# Altium PCB PCB2.PcbDoc
Units mm, origin at the board's own origin, x right, y up, seen from the top; angles counter-clockwise.
Board outline 100 x 50 mm, 2 copper layers (Top Layer, Bottom Layer); 10 components, 8 nets, 30 pads, 12 vias.
Unrouted connection lines stored in the file: 1.
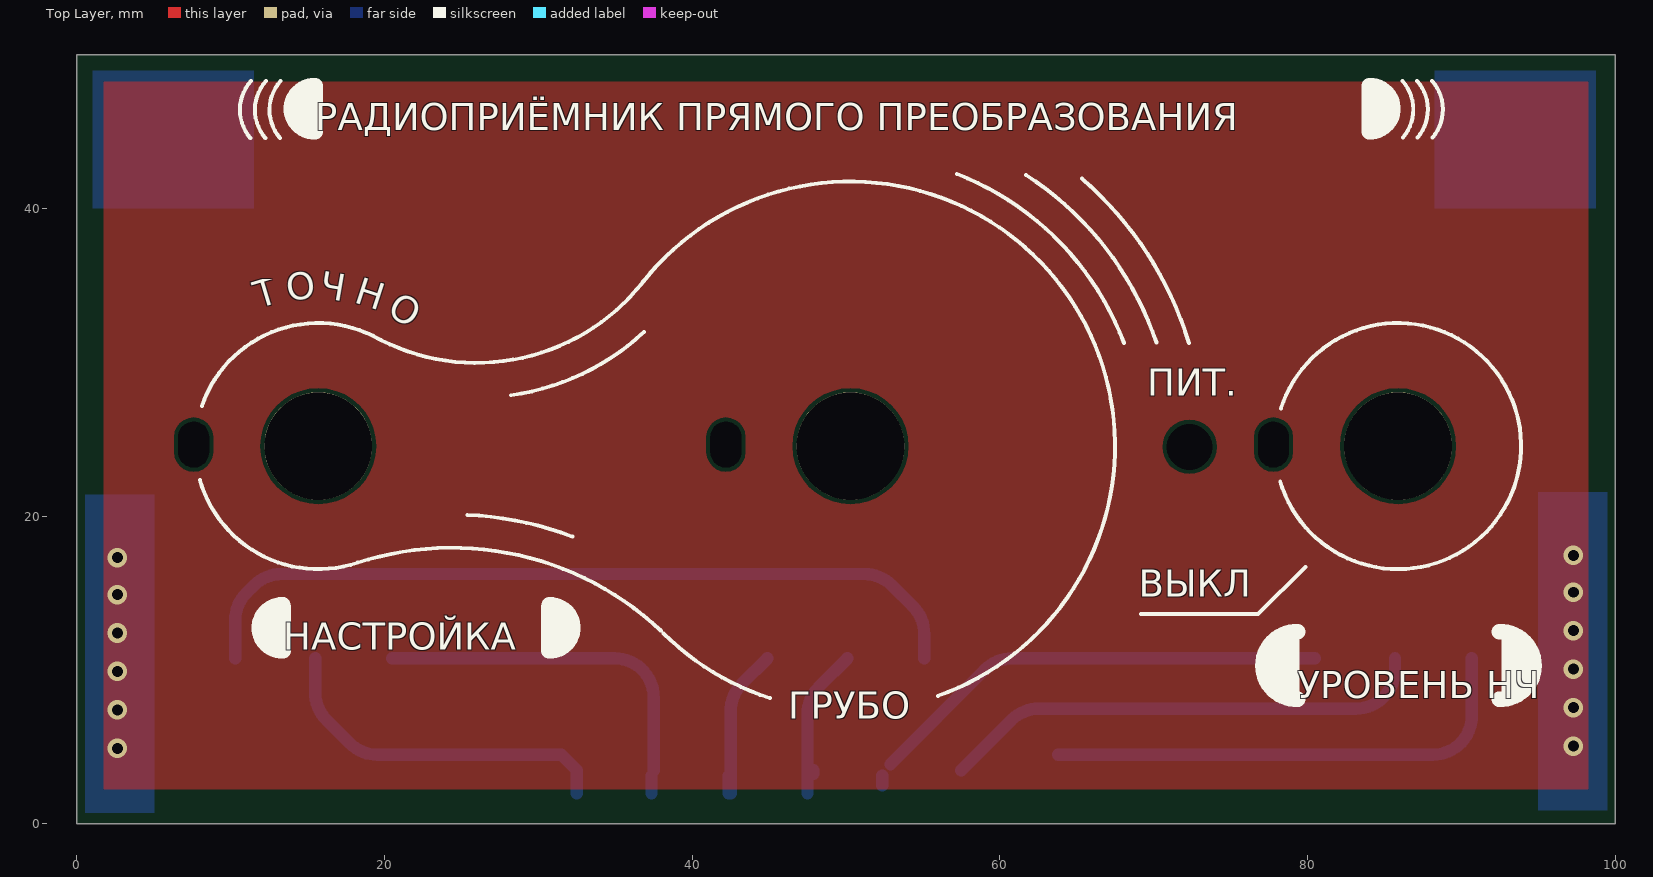
[diagram p0: Top Layer view]
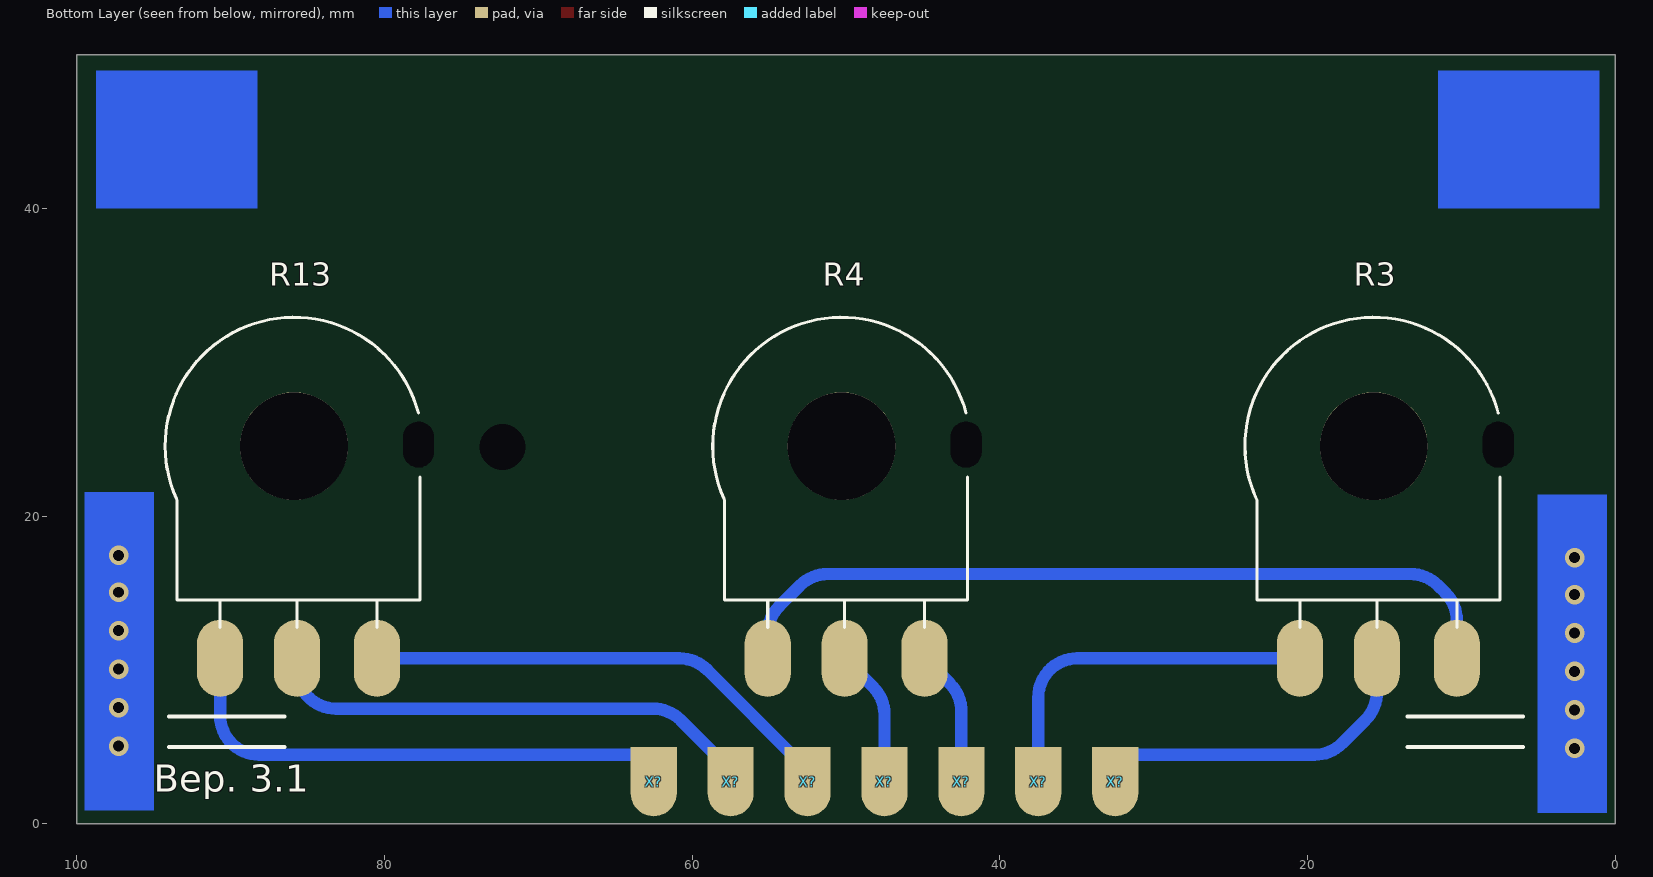
[diagram p1: Bottom Layer view, seen from below]
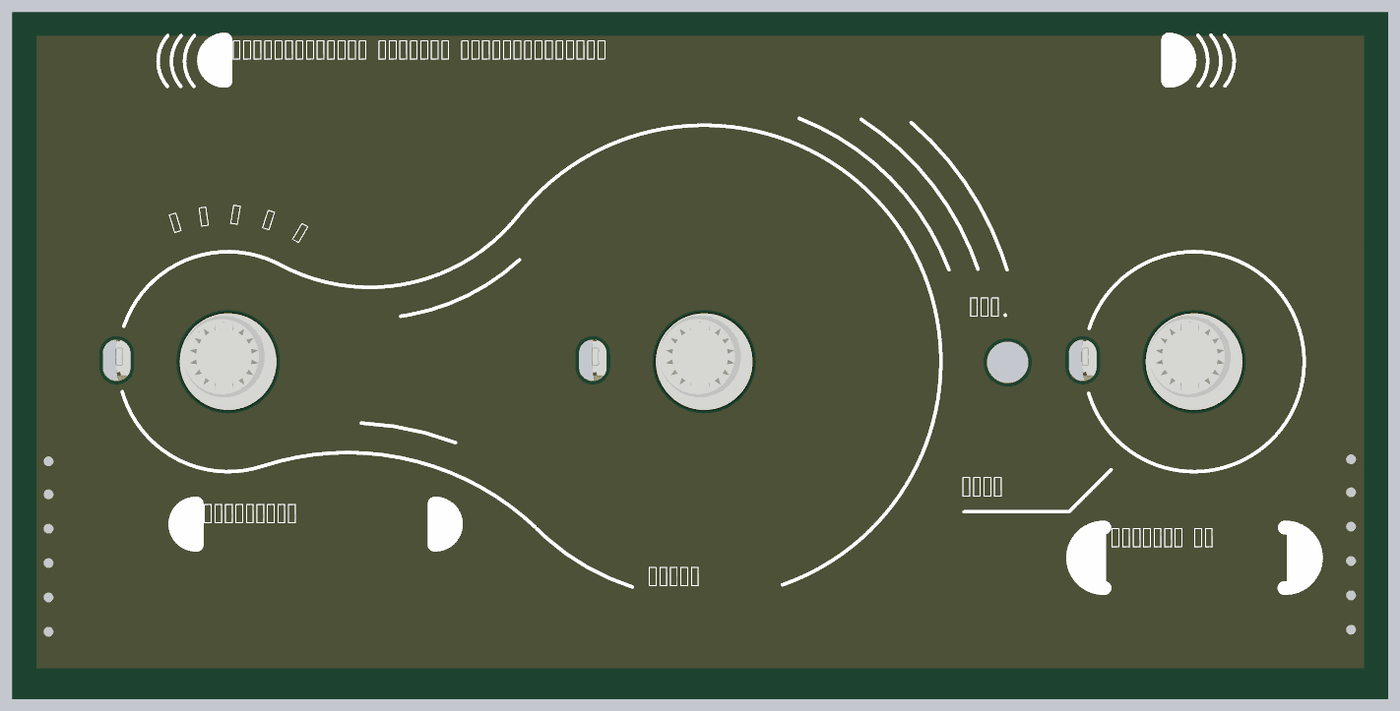
[diagram p2: 3D render of the assembled board from above, using the file's embedded part models]

## Layer stack, top to bottom
Top Solder: solder mask 0.0102, Solder Resist, Dk 3.5
Top Layer: signal copper 0.0356
Dielectric 1: dielectric 0.32, FR-4, Dk 4.8
Bottom Layer: signal copper 0.0356
Bottom Solder: solder mask 0.0102, Solder Resist, Dk 3.5

## Board outline
0,0 100,0 100,50 0,50

## Design rules (kind name [scope] priority, off if disabled: settings)
Clearance [All] p1: gap=0.254 ignorepadtopadclearanceinfootprint=FALSE except(0: Arc-Hole Track-Hole SMDPad-Hole THPad-Hole Via-Hole Fill-Hole Poly-Hole Region-Hole Text-Hole)
PolygonConnect [All] p1: connectstyle=Relief reliefconductorwidth=0.254 reliefentries=4 polygonreliefangle="90 Angle" airgapwidth=0.254
RoomDefinition Sheet2 [InComponentClass('Sheet2')] p1: confinementstyle=ConfineIn formatcopy=TRUE lockcomponents=FALSE outline -27,-75 23.8,-75 23.8,-49.6 -27,-49.6
RoutingVias [All] p1: holewidth=0.711 width=1.27 viastyle="Through Hole" minholewidth=0.711 minwidth=1.27 maxholewidth=0.711 maxwidth=1.27
SolderMaskExpansion [All] p1: expansion=0.102 istentingtop=FALSE
Width [All] p1: maxlimit=2 minlimit=0.254 preferedwidth=0.254
30 further rules are at their usual default settings.

## Classes and differential pairs
component class Sheet2: R3 R4 R13 X?

## Components (designator, comment, footprint, x,y, rotation, side; value= is the part's Value field where it differs from the comment)
R3 "WH148" WH148R 15.689,24.568 r0 top
R4 "WH148" WH148R 50.289,24.568 r0 top
R13 "WH148" WH148R 85.889,24.568 r0 top
X? "SMT_Contact" SMT_CONTACT_TYPE_1 32.5,2 r0 bottom
X? "SMT_Contact" SMT_CONTACT_TYPE_1 57.5,2 r0 bottom
X? "SMT_Contact" SMT_CONTACT_TYPE_1 42.5,2 r0 bottom
X? "SMT_Contact" SMT_CONTACT_TYPE_1 62.5,2 r0 bottom
X? "SMT_Contact" SMT_CONTACT_TYPE_1 52.5,2 r0 bottom
X? "SMT_Contact" SMT_CONTACT_TYPE_1 37.5,2 r0 bottom
X? "SMT_Contact" SMT_CONTACT_TYPE_1 47.5,2 r0 bottom

## Footprints (in the part's own frame and the unit in brackets; to place one, negate y for a bottom-side part, rotate by r counter-clockwise, add the part's x,y. Pads: shape width x height; smd on the part's side, far side on the other; paste and mask are expansions set on the pad)
SMT_CONTACT_TYPE_1 [mm]
  rect 3x3 smd: 1(0,-1.5)
  round 3 smd: 1(0,0)
WH148R [mm]
  oval 3x5 smd far side: 1(4.8,-13.8) 2(-0.2,-13.8) 3(-5.4,-13.8)
  round 0 hole 3 slot 2 at 0 deg: HOLE(-8.1,0.1)
  round 7 hole 7: HOLE(0,0)
  body extent -8.17,-16.4 7.57,8.24, height 17.73

## Free pads (board coordinates)
  round 1.5 hole 3: 0(72.339,24.518)

## Via types
v1: diameter 1.27, hole 0.711, Top Layer to Bottom Layer, tented top, 12 vias

## Nets (pads, with @x,y where several pads share a name; then routed paths per layer and width w, separated by ;. In a path a pad name is that pad's centre, name@x,y a point inside that pad or via, vN(x,y) a via of type N, cw(c..) or ccw(c..) an arc to the next point about the centre after c; other vN are vias at no path point)
GND: R13.3 X?.1@52.5,2 X?.1@52.5,3.5 | length 31
  Bottom Layer w0.8: X?.1@52.361,2.511 X?.1@52.361,3.132 ; X?.1@52.889,3.889 59.024,10.024 cw(c60.82,8.228) 60.82,10.768 73.5,10.768 R13.3
  other v1: 2.639,4.918 97.289,5.068 2.639,7.418 97.289,7.568 2.639,9.918 97.289,10.068 2.639,12.418 97.289,12.568 2.639,14.918 97.289,15.068 2.639,17.318 97.289,17.468
NetR3_1: R3.1 X?.1@37.5,2 X?.1@37.5,3.5 | length 24.3
  Bottom Layer w0.8: R3.1 34.96,10.768 cw(c34.96,8.228) 36.228,10.429 cw(c34.96,8.228) 37.161,9.496 cw(c34.96,8.228) 37.5,8.228 X?.1@37.5,3.5 ; X?.1@37.361,2 X?.1@37.361,3.132
NetR3_2: R3.2 X?.1@32.5,2 X?.1@32.5,3.5 | length 23.2
  Bottom Layer w0.8: R3.2 15.489,8.563 ccw(c18.029,8.563) 16.233,6.767 17.756,5.244 ccw(c19.552,7.04) 19.552,4.5 31.5,4.5 32.5,3.5 X?.1@32.5,2
NetR3_3: R3.3 R4.1 | length 52.5
  Bottom Layer w0.8: R3.3 10.289,13.237 cw(c12.829,13.237) 11.033,15.033 11.506,15.506 cw(c13.302,13.71) 13.302,16.25 51.198,16.25 cw(c51.198,13.71) 52.994,15.506 54.345,14.155 cw(c52.549,12.359) 55.089,12.359 R4.1
NetR4_2: R4.2 X?.1@47.5,2 X?.1@47.5,3.5 | length 10
  Bottom Layer w0.8: X?.1@47.5,2 47.5,3.5 47.5,7.127 cw(c50.04,7.127) 48.244,8.923 R4.2 ; X?.1@47.889,3.268 X?.1@47.889,3.5
NetR4_3: R4.3 X?.1@42.5,2 X?.1@42.5,3.5 | length 10.8
  Bottom Layer w0.8: X?.1@42.361,2 X?.1@42.361,3.132 ; X?.1@42.5,2 42.5,3.5 42.5,7.327 cw(c45.04,7.327) 43.244,9.123 R4.3
NetR13_1: R13.1 X?.1@62.5,2 X?.1@62.5,3.5 | length 32.1
  Bottom Layer w0.8: X?.1@63.778,4.5 88.149,4.5 ccw(c88.149,7.04) 90.689,7.04 R13.1
NetR13_2: R13.2 X?.1@57.5,2 X?.1@57.5,3.5 | length 31.9
  Bottom Layer w0.8: X?.1@57.5,3.5 60.756,6.756 cw(c62.552,4.96) 62.552,7.5 83.149,7.5 ccw(c83.149,10.04) 85.689,10.04 R13.2
pads on no net: R3.HOLE R4.HOLE R13.HOLE

## Polygon pours and split planes (outlines as drawn)
GND on Top Layer "Top Layer-GND 1" (solid, pour order 2): 1.75,48.268 1.75,2.268 98.25,2.268 98.25,48.268

## Other copper
Bottom Layer:
  region: 88.25,49 88.25,40 98.75,40 98.75,49
  region net GND: 5.039,21.418 0.539,21.418 0.539,0.718 5.039,0.718
  region: 1,49 1,40 11.5,40 11.5,49
  region net GND: 99.489,21.568 94.989,21.568 94.989,0.868 99.489,0.868

## Silkscreen, mask and mechanical layers (free items; w line width, h text height)
Top Overlay:
  region: 13.912,14.25 12.162,14.25 12.162,11.25 13.912,11.25
  rectangle: 30.187,11.25 31.938,14.25
  region: 79.494,12.026 77.494,12.026 77.494,8.526 79.494,8.526
  rectangle: 92.619,8.601 94.369,12.101
  rectangle: 83.5,45 85.25,48
  region: 16,48 14.25,48 14.25,45 16,45
  lines w0.25: 69.164,13.643 76.789,13.643 79.864,16.718
  lines w0.256: 7.994,22.378 ccw(c15.689,24.568) 18.25,16.989 ; 8.12,27.158 cw(c15.689,24.568) 19.27,31.722 ; 11.275,44.6 cw(c13.397,46.427) 11.307,48.291 ; 12.25,44.6 cw(c14.372,46.427) 12.282,48.291 ; 13.2,44.6 cw(c15.322,46.427) 13.232,48.291 ; 18.241,16.986 cw(c24.374,-1.876) 37.971,12.563 ; 19.228,31.755 ccw(c25.988,43.717) 36.817,35.261 cw(c50.289,24.568) 55.971,8.334 ; 25.377,20.101 cw(c24.374,-1.876) 32.211,18.681 ; 28.23,27.875 ccw(c25.988,43.717) 36.858,31.977 ; 38.141,12.391 ccw(c50.289,24.568) 45.065,8.18 ; 57.198,42.267 cw(c50.289,24.568) 68.071,31.261 ; 61.704,42.195 cw(c50.289,24.568) 70.181,31.299 ; 65.33,41.968 cw(c50.289,24.568) 72.296,31.255 ; 78.23,22.258 ccw(c85.889,24.568) 78.266,26.995 ; 86.168,48.316 cw(c84.078,46.452) 86.2,44.625 ; 87.118,48.316 cw(c85.028,46.452) 87.15,44.625 ; 88.093,48.316 cw(c86.003,46.452) 88.125,44.625
  lines w1: 13.397,14.249 ccw(c13.35,12.75) 13.412,11.251 ; 15.484,47.999 ccw(c15.437,46.5) 15.5,45.001 ; 30.688,11.251 ccw(c30.75,12.75) 30.703,14.249 ; 79.362,12.5 ccw(c79.294,10.301) 79.385,8.103 ; 84,45.001 ccw(c84.062,46.5) 84.016,47.999 ; 92.452,8.103 ccw(c92.544,10.301) 92.475,12.5
  text "РАДИОПРИЁМНИК ПРЯМОГО ПРЕОБРАЗОВАНИЯ" at 15.5,44.5 h3
  text "Ч" at 15.6,33.65 h3 r350.35
  text "О" at 13.8,33.4 h3 r7.74
  text "Н" at 17.775,33.375 h3 r341.91
  text "Т" at 12,32.95 h3 r16.7
  text "О" at 19.775,32.65 h3 r329.51
  text "ПИТ." at 69.589,27.268 h3
  text "ВЫКЛ" at 69.039,14.193 h3
  text "НАСТРОЙКА" at 13.412,10.75 h3
  text "УРОВЕНЬ НЧ" at 79.383,7.594 h3
  text "ГРУБО" at 46.25,6.25 h3
Bottom Overlay:
  lines w0.254: 6,5 13.5,5 ; 6,7 13.5,7 ; 86.5,5 94,5 ; 86.5,7 94,7
  text "Вер. 3.1" at 95,1.5 h3
Mechanical 13 (Mech13):
  the board outline again, w0.15